# Altium PCB MB_SpectrumAnalyzer.PcbDoc (part 3 of 3)
Units mil, origin at the board's own origin, x right, y up, seen from the top; angles counter-clockwise.
Board outline 6149 x 3004 mil, 2 copper layers (Top Layer, Bottom Layer); 237 components, 180 nets, 644 pads, 101 vias.
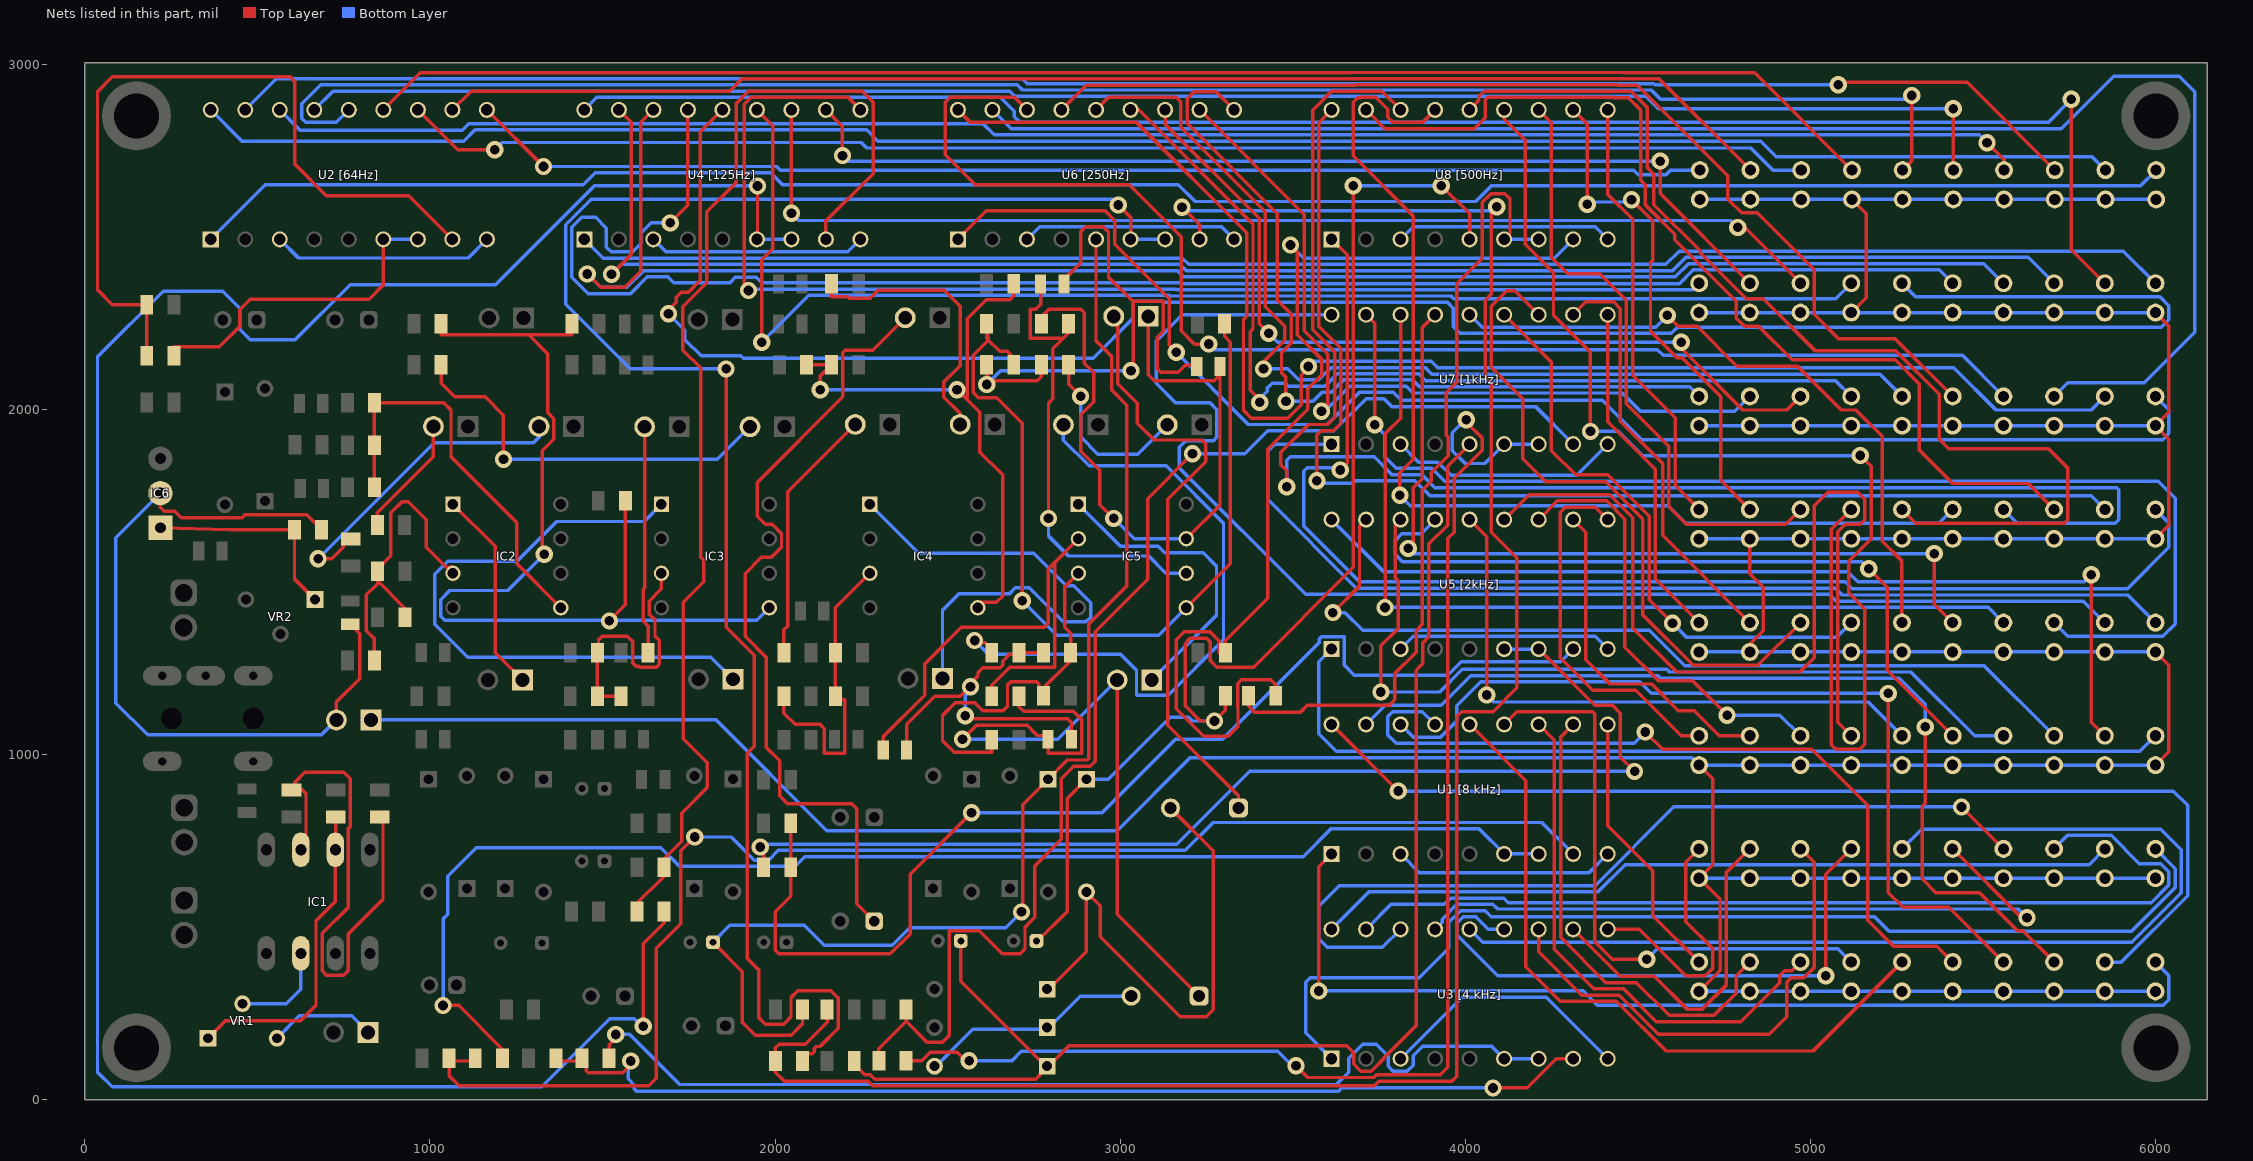
[diagram p2: the nets of this part, all layers, seen from the top]

## Via types
v1: diameter 50, hole 28, Top Layer to Bottom Layer, 101 vias

## Nets (pads, with @x,y where several pads share a name; then routed paths per layer and width w, separated by ;. In a path a pad name is that pad's centre, name@x,y a point inside that pad or via, vN(x,y) a via of type N, cw(c..) or ccw(c..) an arc to the next point about the centre after c; other vN are vias at no path point) (continued)
NetC24_2: C24.1 J15.02 | length 2339.1
  Top Layer w10: C24.1@2287.21,517 2236.1,568.12 2236.1,842.9 2222,857 2036,857 2013,880 2013,982 1975,1020 1975,1280 1913,1342 1913,1524 1960,1571 1989.54,1571 2018.54,1600 2018.54,1640 1991.54,1667 1971,1667 1948,1690 1948,1788 2196,2036 2196,2164 2203,2171 2282.8,2171 J15.02@2377.13,2265.33
NetC25_1: "U6 [250Hz].5" C25.1 D12.C R50.2 | length 3635.3
  Top Layer w10: C25.1@1820,456 1905,371 1905,224 1942,187 2046.37,187 2079.37,220 R50.2@2079.37,261 ; v1(2714,544) 2717.37,547.37 2717.37,854.6 D12.C@2791,928.23 2846.77,984 2903.77,984 2909,989.23 2909,1378 3019,1488 3019,2012 2975,2056 2975,2153 2929.67,2198.33 2929.67,2492.5
  Bottom Layer w10: C25.1@1820,456 1869,505 2084,505 2142,447 2339,447 2390,498 2668,498 v1(2714,544)
NetC26_1: C26.1 C27.1 R53.2 R54.2 | length 1031.5
  Top Layer w10: C27.1@2380.86,1013 2380.86,1087 2462.86,1169 2536.43,1169 2563.43,1196 v1(2566,1196) 2566,1206.82 2587.8,1228.62 2587.8,1236.8 2601.86,1250.86 2652.4,1250.86 2659.54,1257.99 2659.54,1270.54 2680,1291 2706.37,1291 R53.2@2706.37,1294.82 R54.2@2777.5,1294.82 ; v1(2551,1112) 2560,1103 2847.61,1103 2858.61,1092 C26.1@2858.61,1044
  Bottom Layer w10: v1(2551,1112) 2551,1170.18 2566,1185.18 v1(2566,1196)
NetC26_2: C26.2 C30.1 J18.02 R55.2 | length 2286.3
  Top Layer w10: v1(2543,1044) 2583.36,1084.36 2730.64,1084.36 2760,1055 2790.89,1055 C26.2@2790.89,1044 2790.89,1003 2889,1003 2889,1100 2864,1125 2720,1125 2706.37,1138.63 R55.2@2706.37,1168.82 ; J18.02@2991,1216 2991,537.43 C30.1@3228.43,300
  Bottom Layer w10: v1(2543,1044) 2819,1044 J18.02@2991,1216
NetC27_2: C27.2 IC5.2 R55.1 | length 1526.2
  Top Layer w10: C27.2@2313.14,1013 2313.14,1052.14 2433,1172 2433,1262.06 2539.78,1368.84 2780,1368.84 2791,1379.84 2791,1537.3 2810,1556.3 ; R55.1@2627.63,1168.82 2627.63,1200.63 2680,1253 2810,1253 2810,1556.3 ; IC5.2@2878.7,1625 2810,1556.3
NetC28_1: C28.1 IC5.7 J19.01 R60.1 | length 1989.7
  Top Layer w10: R60.1@2771.5,2248 2771.5,2268 2793.5,2290 2886,2290 2896,2280 2896,2134 2923,2107 2923,2022 2885,1984 2885,1879 2941,1823 2941,1724 v1(2981,1684) ; J19.01@3081.13,2269.33 3081.13,2100 3098.13,2083 3271.86,2083 C28.1@3288.86,2100 ; IC5.7@3191.3,1625 3288.86,1722.56 C28.1@3288.86,2100 ; C28.1@3288.86,2128 C28.1@3288.86,2100
  Bottom Layer w10: v1(2981,1684) 3040,1625 IC5.7@3191.3,1625
NetC28_2: C28.2 C29.2 R58.1 R59.2 | length 1953.9
  Top Layer w10: R59.2@2612.63,2129.18 2612.63,2098.37 v1@2628,2083 ; v1(2613,2072) 2624,2083 v1@2628,2083 ; R58.1@2771.5,2129.18 2771.5,2094.5 ; C29.2@2836.86,2362.82 2836.86,2376 2886,2425.14 2886,2515 2900,2529 2950,2529 2965.9,2513.1 2965.9,2383 3036.45,2312.45 3038,2312.45 ; v1(3031,2112) 3038,2119 3038,2312.45 ; C28.2@3221.14,2128 3188.55,2128 3167.55,2107 3117.25,2107 3107,2117.25 3107,2208.96 3124.25,2226.21 3124.25,2312.45 3038,2312.45 ; v1@2628,2083 2628.5,2082.5 2760,2082.5 2771.5,2094.01 2771.5,2094.5 ; v1@2628,2083 2760,2083 2771.5,2094.5
  Bottom Layer w10: v1(2613,2072) 2653,2112 v1(3031,2112)
NetC29_1: C29.1 IC5.6 R60.2 | length 1357.2
  Top Layer w10: C29.1@2769.14,2362.82 2769.14,2304 2755.14,2290 2739,2290 2739,2206 2834.24,2206 ; v1(2792,1684) 2792,2018 2804,2030 2804,2175.76 2834.24,2206 ; R60.2@2850.24,2248 2850.24,2222 2834.24,2206
  Bottom Layer w10: v1(2792,1684) 2792,1633 2850,1575 3082,1575 3132,1525 IC5.6@3191.3,1525
NetC30_2: C30.2 D13.A D14.C | length 655.4
  Bottom Layer w10: D13.A@2461.9,93 2572.9,204 2788.35,204 2884.35,300 C30.2@3031.57,300
NetC31_1: "U7 [1kHz].5" C31.1 D13.C R63.2 | length 4018.6
  Top Layer w10: R63.2@2229.37,112 2229.37,102.16 2259.48,72.04 2275.96,72.04 2288.37,59.63 2754.98,59.63 2768.86,73.5 2768.86,77.63 2784.23,93 D13.C@2788.35,93 ; C31.1@2538,456 2538,343.35 D13.C@2788.35,93 ; 4012,1899 3948.23,1835.23 3948.23,1664.23 3894,1610 3894,1341 3875.65,1322.65 3875.65,1263 3857,1244.35 3857,214.73 3762.64,120.37 3762.64,117.9 3734.73,90 3727.01,82.27 3696.99,82.27 3689.27,90 3675.77,103.49 3675.77,136.23 3656,156 2851.35,156 D13.C@2788.35,93
NetC32_1: C32.2 D15.C D16.A | length 1547.7
  Top Layer w10: D15.C@2788.36,315 2902,428.64 D16.A@2902,601.77 2942,561.77 2942,472 3174,240 3249,240 3269,260 3269,721.57 C32.2@3145.57,845
NetC32_2: C32.1 J19.02 | length 1745.1
  Top Layer w10: J19.02@2981.13,2269.33 2993,2257.46 2993,2074 3049,2018 3049,1960 3098,1911 3236,1911 3247,1900 3247,1848 3138,1739 3138,1084.43 3342.43,880 C32.1@3342.43,845
NetC33_1: "U8 [500Hz].5" C33.1 D16.C R66.2 | length 3582.4
  Top Layer w10: C33.1@2757,456 2847,546 2847,873.23 D16.C@2902,928.23 ; R66.2@3304.37,1170 3304.37,1128.37 v1(3273,1097) 3232,1097 3188,1141 3188,1321 3193.93,1326.93 3193.93,1328.75 3201.54,1336.36 3203.36,1336.36 3204,1337 3250,1337 3260,1327 3260,1273.27 3280,1253.27 3386.27,1253.27 3675,1542 v1(3675,2648) ; v1(3930,2648) 4012,2566 4012,2492.5
  Bottom Layer w10: D16.C@2902,928.23 2965.18,928.23 3144.95,1108 3198.06,1108 3209.06,1097 v1(3273,1097) ; v1(3675,2648) v1(3930,2648)
NetC34_2: C34.2 IC6.2 J21.02 R69.1 | length 2215.1
  Top Layer w10: IC6.2@219,1757 219,1716 230,1705 261,1705 280,1686 456,1686 464,1694 643.37,1694 R69.1@686.37,1651 ; J21.02@729,1100 729,1152 797,1220 797,1349.43 C34.2@769.29,1377.14
  Bottom Layer w10: IC6.2@219,1757 90,1628 90,1149 182,1057 686,1057 J21.02@729,1100
NetIC1_2: IC1.2 R3.2 VR1.1 | length 921
  Top Layer w10: VR1.1@357,178 407,228 624,228 670,274 670,518 726,574 IC1.2@726,724 726,770 727.06,771.06 R3.2@727.06,818.63
NetIC1_3: IC1.3 R1.2 R2.1 | length 1596.3
  Top Layer w10: R2.1@599.12,897.37 R2.1@609,897.37 ; IC1.3@626,724 626,740 641,740 641,886.37 630,897.37 R2.1@609,897.37 ; R1.2@855,818.63 864,818.63 864,581 764,481 764,375 750,361 700,361 688,373 688,481.9 764,557.9 764,786 768.6,790.6 768.6,930 750.6,948 637,948 609,920 R2.1@609,897.37
NetIC1_6: IC1.6 VR1.2 | length 290.4
  Bottom Layer w10: VR1.2@457,278 584,278 626,320 IC1.6@626,424
NetIC2_1: IC2.1 J10.01 | length 592.4
  Top Layer w10: IC2.1@1066.7,1725 1189,1602.7 1189,1295 J10.01@1268,1216
NetIC2_3: IC2.3 R4.1 R10.1 R11.2 | length 940.6
  Top Layer w10: R11.2@839.37,1272 839.37,1335 816,1358.37 816,1462.37 848.63,1495 R4.1@848.63,1502.74 ; R10.1@927.37,1397.5 927.37,1424 R4.1@848.63,1502.74 ; IC2.3@1066.7,1525 1066.7,1542.25 1046.75,1542.25 989,1600 989,1680 937,1732 919,1732 887,1700 887,1575.37 848.63,1537 R4.1@848.63,1531.09 R4.1@848.63,1502.74
NetIC2_5: IC2.5 R13.1 R14.1 R15.1 | length 1179.8
  Top Layer w10: R13.1@839.37,1774.33 R14.1@839.37,1896 R15.1@839.37,2019 1040,2019 1061,1998 1061,1862 1251,1672 1251,1553.3 IC2.5@1379.3,1425
NetIC3_1: IC3.1 J12.01 | length 1816.6
  Bottom Layer w10: IC3.1@1670.7,1725 1620.7,1675 1367,1675 1252.25,1560.25 1051.25,1560.25 1013.45,1522.45 1013.45,1377.77 1109.22,1282 1814,1282 J12.01@1878,1218
NetIC3_3: IC3.3 R20.1 R22.1 R23.2 | length 780.1
  Top Layer w10: R23.2@1553.5,1169 R20.1@1485.37,1169 R22.1@1485.37,1294.82 1488.36,1297.81 1488.36,1332.5 1498.86,1343 1572,1343 1587,1328 1587,1266 1598,1255 1606.43,1255 1608.16,1253.27 1656.42,1253.27 1664,1260.86 1664,1331 1652,1343 1652,1390 1635.45,1406.55 1635.45,1444.45 1670.7,1479.7 IC3.3@1670.7,1525
NetIC3_5: IC3.5 R25.1 R26.1 R27.1 | length 2864
  Top Layer w10: R27.1@1032.37,2248 1032.37,2216 1286,2216 ; v1(1331,1580) 1326,1585 1326,1880 1359.25,1913.25 1359.25,1972.75 1342,1990 1342,2160 1286,2216 ; R25.1@1411.63,2248 1411.63,2216 1286,2216 ; v1@1521,1389 1566.37,1434.37 R26.1@1566.37,1735
  Bottom Layer w10: v1(1331,1580) 1226,1475 1058,1475 1031.45,1448.45 1031.45,1400 1042.45,1389 1947.3,1389 IC3.5@1983.3,1425
  other v1: 1520,1387
NetIC4_1: IC4.1 J14.01 | length 1500.1
  Bottom Layer w10: IC4.1@2274.7,1725 2416.7,1583 2749,1583 2843,1489 2865,1489 2914,1440 2914,1398 2900,1384 2835,1384 2736,1483 2696,1483 2678,1465 2532,1465 2485,1418 J14.01@2485,1220
NetIC4_3: IC4.3 R37.1 R39.1 R40.2 | length 905
  Top Layer w10: R37.1@2025.63,1169 2025.63,1120 2058.63,1087 2130,1087 2142.93,1074.07 2142.93,1003.64 2202,1003.64 2202,1159 2174.63,1159 R40.2@2174.63,1169 R39.1@2174.63,1294.82 2174.63,1424.93 IC4.3@2274.7,1525
NetIC4_5: IC4.5 R42.1 R44.1 R45.1 | length 1734.3
  Top Layer w10: R45.1@2091.24,2129.18 R44.1@2163.63,2129.18 2131,2096.55 v1(2131,2057) ; v1(2527,2057) 2556.21,2027.79 ; IC4.5@2587.3,1425 2587.3,1441 2641,1441 2659,1459 2659,1810 2593,1876 2593,1991 2556.21,2027.79 ; R42.1@2691.37,2364 2691.37,2328.74 2680,2317.37 2611.37,2317.37 2556.21,2262.21 2556.21,2027.79
  Bottom Layer w10: v1(2131,2057) v1(2527,2057)
NetIC5_1: IC5.1 J18.01 | length 881.5
  Bottom Layer w10: IC5.1@2878.7,1725 3000.7,1603 3110,1603 3129,1584 3240,1584 3278.68,1545.32 3278.68,1403.68 J18.01@3091,1216
NetIC5_3: IC5.3 R54.1 R56.1 R57.2 | length 1080.1
  Top Layer w10: R57.2@2627.63,1042.82 2627.63,1006 2519,1006 2485,1040 2485,1112.95 2522.06,1150.01 2578.04,1150.01 2601.05,1127 2660.32,1127 2673.32,1140 2673.32,1201.39 2682.92,1211 2758.33,1211 2764.19,1205.14 2764.19,1193.54 2764.73,1193 R56.1@2777.5,1193 ; R56.1@2777.5,1170 R56.1@2777.5,1193 ; IC5.3@2878.7,1525 2839,1485.3 2839,1368.24 2856.24,1351 R54.1@2856.24,1294.82 2856.24,1271.74 R56.1@2777.5,1193
NetIC5_5: IC5.5 R59.1 R61.1 R62.1 | length 2508.4
  Top Layer w10: R59.1@2691.37,2129.18 2691.37,2149 2672.75,2167.62 2650.3,2167.62 2617.78,2200.14 ; v1(2716,1445) 2716,1960 2642,2034 2589.02,2034 2574.21,2048.8 2574.21,2156.58 2617.78,2200.14 ; IC5.5@3191.3,1425 3319,1552.7 3319,2194.6 3302.24,2211.36 R61.1@3302.24,2248 ; 2617.78,2200.14 2612.63,2205.29 R62.1@2612.63,2248 2617.78,2200.14
  Bottom Layer w10: v1(2716,1445) 2816,1345 3111.3,1345 IC5.5@3191.3,1425
NetIC6_1: IC6.1 R69.2 VR2.1 | length 615.3
  Top Layer w10: IC6.1@219,1657 419,1651 R69.2@607.63,1651 607.63,1508.37 VR2.1@667,1449
NetJ4_01: J4.01 VR1.3 | length 310.8
  Bottom Layer w10: VR1.3@557,178 622,243 773,243 J4.01@821,195
NetJ5_02: J5.02 R9.1 | length 353
  Top Layer w10: R9.1@847.63,1664.67 847.63,1700 1010.13,1862.5 J5.02@1010.13,1950.33
NetJ6_02: J6.02 R12.2 | length 949.7
  Top Layer w10: v1(676,1567) 716,1567 749,1600 749,1624.37 R12.2@770.47,1624.37
  Bottom Layer w10: v1(676,1567) 1012,1903 1300,1903 1316.13,1919.13 J6.02@1316.13,1950.33
NetJ7_02: J7.02 R29.1 | length 662.6
  Top Layer w10: J7.02@1622.13,1949.33 1622.13,1482.92 1617.45,1478.25 1617.45,1386.54 1632.24,1371.75 R29.1@1632.24,1294.82
NetJ8_02: J8.02 R24.2 | length 1153.5
  Top Layer w10: R24.2@1032.37,2129.18 1032.37,2076 1072.37,2036 1160,2036 1213,1983 v1(1213,1855)
  Bottom Layer w10: v1(1213,1855) 1832.79,1855 J8.02@1927.12,1949.33
NetJ9_02: J9.02 R41.2 | length 821.9
  Top Layer w10: R41.2@2163.63,2364 2163.63,2326 2211,2326 2215,2322 2275.55,2322 2298,2344.45 2490.55,2344.45 2536.13,2298.87 2536.13,2126.27 2489,2079.14 2489,2034.93 2536.13,1987.8 J9.02@2536.13,1956.33
NetJ16_02: J16.02 R53.1 | length 1910.7
  Top Layer w10: v1(2578,1330) 2584.5,1323.5 2608.79,1323.5 2627.63,1304.66 R53.1@2627.63,1294.82
  Bottom Layer w10: v1(2578,1330) 2617,1291 3000,1291 3047,1244 3047,1172 3138.57,1172 3299,1332.43 3299,1670 3133,1836 2910,1836 2835.13,1910.87 J16.02@2835.13,1955.33
NetJ17_02: J17.02 R58.2 | length 530.8
  Top Layer w10: R58.2@2850.24,2129.18 2850.24,2072.76 v1(2885,2038)
  Bottom Layer w10: v1(2885,2038) 2885,1920 2935,1870 3050.79,1870 J17.02@3136.12,1955.33
NetJ20_02: J20.02 R36.1 | length 747
  Top Layer w10: R36.1@2025.63,1294.82 2025.63,1360.84 2036.54,1371.75 2036.54,1760.75 J20.02@2232.13,1956.33
NetLED00_K: "U1 [8 kHz].1" LD00.K | length 3023.8
  Top Layer w10: v1(3575,315) 3575,675 3612,712
  Bottom Layer w10: v1(3575,315) 4341,315 4382,274 6022,274 6038,290 6038,359.71 LD00.K@5999,398.71
NetLED01_K: "U1 [8 kHz].18" LD01.K | length 3158.5
  Top Layer w10: 3612,1087 v1(3805,894)
  Bottom Layer w10: v1(3805,894) 6051,894 6092,853 6092,591 5899.71,398.71 LD01.K@5852.11,398.71
NetLED02_K: "U1 [8 kHz].17" LD02.K | length 2704.4
  Top Layer w10: v1(5331.96,1079.96) 5331.96,859.05 5323,850.09 5323,640 5363,600 5489.24,600 5599.32,489.92 5614.01,489.92 LD02.K@5705.22,398.71
  Bottom Layer w10: 3712,1087 3768,1143 3930,1143 4015.23,1228.23 4558.24,1228.23 4565.47,1221 5257,1221 5331.96,1146.04 v1(5331.96,1079.96)
NetLED03_K: "U1 [8 kHz].16" LD03.K | length 2527.8
  Top Layer w10: v1(5225,1177) 5225,600 5268,557 5400.04,557 LD03.K@5558.33,398.71
  Bottom Layer w10: 3812,1087 3848.45,1050.55 3928.55,1050.55 3975,1097 3975,1141.5 4043.73,1210.23 4505.23,1210.23 4538.46,1177 v1(5225,1177)
NetLED04_K: "U1 [8 kHz].15" LD04.K | length 2342.5
  Top Layer w10: v1(4521,1065) 4571,1015 5003,1015 5165,853 5165,520 5240,445 5365.16,445 LD04.K@5411.44,398.71
  Bottom Layer w10: 3912,1087 3875,1124 3789,1124 3775,1110 3775,1056.55 3799,1032.55 4488.55,1032.55 v1(4521,1065)
NetLED05_K: "U1 [8 kHz].14" LD05.K | length 2066.9
  Top Layer w10: 4012,1087 4175,924 4175,385 4275,285 4437.23,285 4581.23,141 5006.84,141 LD05.K@5264.56,398.71
NetLED06_K: "U1 [8 kHz].13" LD06.K | length 1734.1
  Top Layer w10: 4112,1087 4149,1124 4369,1124 4375,1118 4375,457 4425,407 v1(4525,407)
  Bottom Layer w10: v1(4525,407) 4555.71,437.71 5078.67,437.71 LD06.K@5117.67,398.71
NetLED07_K: "U1 [8 kHz].12" LD07.K | length 1554.3
  Top Layer w10: 4212,1087 4257.77,1041.23 4257.77,435.25 4372.02,321 4457.75,321 4552.75,226 4798.07,226 4910.97,338.91 4910.97,360 4924.49,373.52 4945.58,373.52 LD07.K@4970.78,398.71
NetLED08_K: "U1 [8 kHz].11" LD08.K | length 1367.6
  Top Layer w10: 4312,1087 4275.77,1050.77 4275.77,470 4406.77,339 4494.82,339 4589.82,244 4720,244 4784,308 4784,358.82 LD08.K@4823.89,398.71
NetLED09_K: "U1 [8 kHz].10" LD09.K | length 798.1
  Top Layer w10: 4412,1087 4412,794 4543,663 4543,532.71 LD09.K@4677,398.71
NetLED10_K: "U2 [64Hz].1" LD10.K | length 5788.1
  Bottom Layer w10: 365,2492.5 523.5,2651 1444.58,2651 1478.98,2685.39 1987,2685.39 2021.39,2651 3167.91,2651 3216.91,2602 4029.4,2602 4074.4,2647 5955,2647 LD10.K@6001,2693
NetLED11_K: "U2 [64Hz].18" LD11.K | length 5588.6
  Bottom Layer w10: 365,2867.5 455.5,2777 1097.79,2777 1130.6,2809.81 2265.13,2809.81 2297.94,2777 4855.89,2777 4900.89,2732 5815.11,2732 LD11.K@5854.11,2693
NetLED12_K: "U2 [64Hz].17" LD12.K | length 5395.1
  Top Layer w10: v1(5080,2940) 5087,2947 5453.22,2947 LD12.K@5707.22,2693
  Bottom Layer w10: 465,2867.5 555.23,2957.73 2715.94,2957.73 2730.67,2943 4545.46,2943 4548.46,2940 v1(5080,2940)
NetLED13_K: "U2 [64Hz].16" LD13.K | length 5100.6
  Top Layer w10: v1(5511,2772) 5560.33,2722.67 LD13.K@5560.33,2693
  Bottom Layer w10: 565,2867.5 623.5,2809 1093.79,2809 1112.6,2827.81 2602.19,2827.81 2635,2795 5488,2795 v1(5511,2772)
NetLED14_K: "U2 [64Hz].15" LD14.K | length 4969.7
  Top Layer w10: LD14.K@5413.44,2693 v1(5413.44,2870.6)
  Bottom Layer w10: 665,2867.5 719.23,2921.73 2679.94,2921.73 2694.67,2907 4522,2907 4558.4,2870.6 v1(5413.44,2870.6)
NetLED15_K: "U2 [64Hz].14" LD15.K | length 5133.9
  Top Layer w10: LD15.K@5266.56,2693 5293,2719.44 v1(5293,2909)
  Bottom Layer w10: 765,2867.5 728.77,2831.27 640,2831.27 628.77,2842.5 628.77,2884.77 683.73,2939.73 2701.9,2939.73 2716.63,2925 4538,2925 4565,2898 5282,2898 v1(5293,2909)
NetLED16_K: "U2 [64Hz].13" LD16.K | length 4416.6
  Top Layer w10: 865,2867.5 972.5,2975 3666.44,2975 3667.17,2975.73 4456.83,2975.73 4457.56,2975 4837.67,2975 LD16.K@5119.67,2693
NetLED17_K: "U2 [64Hz].12" LD17.K | length 4097.5
  Top Layer w10: 965,2867.5 1080.5,2752 v1(1188,2752)
  Bottom Layer w10: v1(1188,2752) 1209,2773 2250,2773 2266,2757 4827,2757 4891,2693 LD17.K@4972.78,2693
NetLED18_K: "U2 [64Hz].11" LD18.K | length 3907.9
  Top Layer w10: 1065,2867.5 1119.23,2921.73 1868.43,2921.73 1903.7,2957 3673.9,2957 3674.63,2957.73 4449.37,2957.73 4450.1,2957 4561.89,2957 LD18.K@4825.89,2693
NetLED19_K: "U2 [64Hz].10" LD19.K | length 3597
  Top Layer w10: 1165,2867.5 v1(1329.11,2703.39)
  Bottom Layer w10: v1(1329.11,2703.39) 2005,2703.39 2015.39,2693 4488,2693 4501,2680 4581,2680 4594,2693 LD19.K@4679,2693
NetLED20_K: "U3 [4 kHz].1" LD20.K | length 3113.9
  Bottom Layer w10: 3612,118.5 3537,193.5 3537,340 3550,353 3866,353 3952,439 3952,513.46 3986.27,547.73 4057.27,547.73 4075,530 5185,530 5227,488 5929.46,488 6056,614.54 6056,669.47 LD20.K@5999,726.47
NetLED21_K: "U3 [4 kHz].18" LD21.K | length 2336.6
  Bottom Layer w10: 3612,493.5 3720.23,601.73 4383.73,601.73 4463,681 5806.64,681 LD21.K@5852.11,726.47
NetLED22_K: "U3 [4 kHz].17" LD22.K | length 2820.9
  Bottom Layer w10: 3712,493.5 3784.23,565.73 3939.07,565.73 3957.07,583.73 4110.96,583.73 4124.31,570.38 5986.38,570.38 6038,622 6038,660 6014,684 5952,684 5870.53,765.47 5744.22,765.47 LD22.K@5705.22,726.47
NetLED23_K: "U3 [4 kHz].16" LD23.K | length 2516.1
  Top Layer w10: v1(5436.8,848) LD23.K@5558.33,726.47
  Bottom Layer w10: 3812,493.5 3759.5,441 3600,441 3575,466 3575,560 3634.73,619.73 4375.73,619.73 4604,848 v1(5436.8,848)
NetLED24_K: "U3 [4 kHz].15" LD24.K | length 2064.5
  Top Layer w10: LD24.K@5411.44,726.47 5610.91,527 v1(5627,527)
  Bottom Layer w10: 3912,493.5 3932.23,513.73 3932.23,522.89 3975.07,565.73 4079.61,565.73 4092.96,552.38 5601.62,552.38 v1(5627,527)
NetLED25_K: "U3 [4 kHz].14" LD25.K | length 3119.7
  Bottom Layer w10: 4012,493.5 4049.79,455.71 5930.71,455.71 6074,599 6074,724 6014.53,783.47 5321.56,783.47 LD25.K@5264.56,726.47
NetLED26_K: "U3 [4 kHz].13" LD26.K | length 1709
  Top Layer w10: v1(5044,359) 5044,652.8 LD26.K@5117.67,726.47
  Bottom Layer w10: 4112,493.5 4065.5,493.5 4029.27,529.73 3993.73,529.73 3975,511 3975,478 4094,359 v1(5044,359)
NetLED27_K: "U3 [4 kHz].12" LD27.K | length 1461.3
  Top Layer w10: 4212,493.5 4212,428 4337,303 4445,303 4559,189 4880,189 4931,240 4931,340 4944,353 4980.22,353 5010,382.78 5010,687.24 LD27.K@4970.78,726.47
NetLED28_K: "U3 [4 kHz].11" LD28.K | length 991
  Top Layer w10: 4312,493.5 4448.5,357 4547.34,357 4641.77,262.57 4686.57,262.57 4756.16,332.16 4756.16,658.73 LD28.K@4823.89,726.47
NetLED29_K: "U3 [4 kHz].10" LD29.K | length 763.3
  Top Layer w10: 4412,493.5 4503.5,493.5 4638,359 4695,359 4716,380 4716,438 4638,516 4638,687.47 LD29.K@4677,726.47
NetLED30_K: "U4 [125Hz].1" LD30.K | length 4636.1
  Bottom Layer w10: 1447.33,2492.5 1501.83,2438 3180.01,2438 3198.01,2420 4580.67,2420 4618.91,2458.24 5906,2458.24 LD30.K@5999,2365.24
NetLED31_K: "U4 [125Hz].18" LD31.K | length 4962.3
  Top Layer w10: v1(5755,2898) 5755,2462.35 LD31.K@5852.11,2365.24
  Bottom Layer w10: 1447.33,2867.5 1483.56,2903.73 2652.27,2903.73 2693,2863 2693,2848 2710,2831 5688,2831 v1(5755,2898)
NetLED32_K: "U4 [125Hz].17" LD32.K | length 4760.9
  Top Layer w10: v1(1526,2391) 1583.56,2448.56 1583.56,2831.27 1547.33,2867.5
  Bottom Layer w10: v1(1526,2391) 1555,2420 3172.55,2420 3190.55,2402 4600.54,2402 4638.79,2440.24 5630.22,2440.24 LD32.K@5705.22,2365.24
NetLED33_K: "U4 [125Hz].16" LD33.K | length 4858.9
  Top Layer w10: v1(1456,2392) 1495,2353 1564,2353 1611,2400 1611,2831.17 1647.33,2867.5
  Bottom Layer w10: v1(1456,2392) 1495,2353 1570.2,2353 1619.2,2402 3165.1,2402 3183.1,2384 4608,2384 4646.24,2422.24 5501.33,2422.24 LD33.K@5558.33,2365.24
NetLED34_K: "U4 [125Hz].15" LD34.K | length 5010.2
  Top Layer w10: v1(1696,2540) 1747.33,2591.33 1747.33,2867.5
  Bottom Layer w10: v1(1696,2540) 1641.1,2540 1611.1,2510 1611.1,2480 1587.1,2456 1525,2456 1511,2470 1511,2525 1480,2556 1440,2556 1411,2527 1411,2383 1459,2335 1581,2335 1630,2384 1689.14,2384 1706.69,2366.45 1869.45,2366.45 1885,2382 1945.45,2382 1961,2366.45 3175.19,2366.45 3177.41,2364.23 4619.98,2364.23 4660,2404.24 5372.44,2404.24 LD34.K@5411.44,2365.24
NetLED35_K: "U4 [125Hz].14" LD35.K | length 6106.8
  Top Layer w10: v1(1691,2277) 1691,2287.82 1713.38,2310.21 1713.38,2324.38 1728.11,2339.11 1749.11,2339.11 1783.56,2373.56 1783.56,2803.73 1847.33,2867.5
  Bottom Layer w10: v1(1691,2277) 1738.7,2229.3 1738.7,2202.04 1741.63,2199.11 1785.74,2155 1901,2155 1908,2148 2921.44,2148 3038,2264.56 3038,2312.45 3125,2312.45 3127.22,2310.23 3948,2310.23 3965,2293.23 3965,2240 3985.23,2219.77 4596,2219.77 4614.23,2238 6016,2238 6038,2260 6038,2300 6012,2326 5303.8,2326 LD35.K@5264.56,2365.24
NetLED36_K: "U4 [125Hz].13" LD36.K | length 3942.1
  Top Layer w10: 1947.33,2867.5 1993.24,2821.59 1993.24,2465.24 1961,2433 v1(1961,2194)
  Bottom Layer w10: v1(1961,2194) 2097.45,2330.45 3142.25,2330.45 3144.47,2328.23 3958,2328.23 3966.23,2320 5072.42,2320 LD36.K@5117.67,2365.24
NetLED37_K: "U4 [125Hz].12" LD37.K | length 3307.1
  Top Layer w10: v1(2047.33,2567.67) 2047.33,2867.5 ; v1(4789.02,2527) 4809.02,2527 LD37.K@4970.78,2365.24
  Bottom Layer w10: v1(2047.33,2567.67) 2068,2547 4769.02,2547 v1(4789.02,2527)
NetLED38_K: "U4 [125Hz].11" LD38.K | length 2989.2
  Top Layer w10: 2147.33,2867.5 2195.12,2819.71 v1(2195.12,2735) ; v1(4564,2719) 4564,2625.13 LD38.K@4823.89,2365.24
  Bottom Layer w10: v1(2195.12,2735) 2211.12,2719 v1(4564,2719)
NetLED39_K: "U4 [125Hz].10" LD39.K | length 3669.1
  Top Layer w10: v1(1923,2344) 1911,2356 1911,2884 1930.73,2903.73 2211.1,2903.73 2247.33,2867.5
  Bottom Layer w10: v1(1923,2344) 1927.45,2348.45 3160.25,2348.45 3162.47,2346.23 4657.98,2346.23 LD39.K@4677,2365.24
NetLED40_K: "U5 [2kHz].1" LD40.K | length 2724.7
  Bottom Layer w10: 3612,1305.5 3575,1268.5 3575,1060 3626,1009 5953.78,1009 LD40.K@5999,1054.22
NetLED41_K: "U5 [2kHz].18" LD41.K | length 2767.4
  Top Layer w10: v1(5813,1521) 5813,1093.33 LD41.K@5852.11,1054.22
  Bottom Layer w10: 3612,1680.5 3762.5,1530 5106,1530 5136,1500 5792,1500 v1(5813,1521)
NetLED42_K: "U5 [2kHz].17" LD42.K | length 2546.3
  Top Layer w10: v1(3616,1411) 3693,1488 3693,1661.5 3712,1680.5
  Bottom Layer w10: v1(3616,1411) 3650.96,1411 3701.96,1360 4532,1360 4634.87,1257.13 5502.31,1257.13 LD42.K@5705.22,1054.22
NetLED43_K: "U5 [2kHz].16" LD43.K | length 2441.1
  Top Layer w10: v1(3755,1181) 3755,1315 3805,1365 3805,1503 3796,1512 3796,1664.5 3812,1680.5
  Bottom Layer w10: v1(3755,1181) 3925,1181 3991,1247 4583,1247 4591,1239 5290.13,1239 5474.91,1054.22 LD43.K@5558.33,1054.22
NetLED44_K: "U5 [2kHz].15" LD44.K | length 2155.1
  Top Layer w10: v1(5168,1538) 5222,1484 5222,1243.67 LD44.K@5411.44,1054.22
  Bottom Layer w10: 3912,1680.5 3871.5,1640 3816,1640 3796,1620 3796,1580 3817,1559 5147,1559 v1(5168,1538)
NetLED45_K: "U5 [2kHz].14" LD45.K | length 1780.4
  Top Layer w10: 4012,1680.5 4062,1630.5 v1(4062,1172.23)
  Bottom Layer w10: v1(4062,1172.23) 4082.23,1152 5166.78,1152 LD45.K@5264.56,1054.22
NetLED46_K: "U5 [2kHz].13" LD46.K | length 2717.6
  Top Layer w10: 4112,1680.5 4184.23,1752.73 4418.06,1752.73 4485,1685.79 4485,1366 4612,1239 4969,1239 5010,1280 5010,1720 5050,1760 5137,1760 5157,1740 5157,1680 5144,1667 5100,1667 5078,1645 5078,1093.89 LD46.K@5117.67,1054.22
NetLED47_K: "U5 [2kHz].12" LD47.K | length 1280.5
  Top Layer w10: 4212,1680.5 4266.23,1734.73 4409.01,1734.73 4462,1681.74 4462,1310.72 4559.72,1213 4659,1213 v1(4758,1114)
  Bottom Layer w10: v1(4758,1114) 4911,1114 LD47.K@4970.78,1054.22
NetLED48_K: "U5 [2kHz].11" LD48.K | length 987.7
  Top Layer w10: 4312,1680.5 4349,1643.5 4349,1274 4418.74,1204.26 4539.22,1204.26 4616.48,1127 4663,1127 4735.78,1054.22 LD48.K@4823.89,1054.22
NetLED49_K: "U5 [2kHz].10" LD49.K | length 1075.6
  Top Layer w10: 4412,1680.5 4375.77,1716.73 4289.73,1716.73 4275,1702 4275,1280 4368.74,1186.26 4493.2,1186.26 4625.24,1054.22 LD49.K@4677,1054.22
NetLED50_K: "U6 [250Hz].1" LD50.K | length 4144.4
  Top Layer w10: 2529.67,2492.5 2612.17,2575 2955.63,2575 2983.9,2546.73 2983.9,2478.35 3142.25,2320 3142.25,2185 v1(3162.25,2165)
  Bottom Layer w10: v1(3162.25,2165) 3371.25,1956 3600,1956 3693,2049 3791.23,2049 3814.23,2026 4396,2026 4510,1912 6020,1912 6038,1930 6038,1998.49 LD50.K@5999,2037.49
NetLED51_K: "U6 [250Hz].18" LD51.K | length 4203
  Top Layer w10: 2529.67,2867.5 2566.17,2831 3047,2831 3366.5,2511.5 3366.5,2269.21 3357,2259.71 3357,1997.14 3380,1974.14 3485.14,1974.14 3524,2013 3524,2098.14 3545,2119.14 v1(3545,2124)
  Bottom Layer w10: v1(3545,2124) 3560,2139 3901,2139 3920,2120 5415,2120 5537,1998 5812.62,1998 LD51.K@5852.11,2037.49
NetLED52_K: "U6 [250Hz].17" LD52.K | length 4769.1
  Bottom Layer w10: 2629.67,2867.5 2684.17,2813 5726,2813 5878,2965 6068,2965 6113,2920 6113,2223 5967,2077 5744.73,2077 LD52.K@5705.22,2037.49
NetLED53_K: "U6 [250Hz].16" LD53.K | length 3924.2
  Top Layer w10: 2729.67,2867.5 2693.44,2903.73 2507.73,2903.73 2493,2889 2493,2738 2580,2651 3026,2651 3177,2500 3177,2227 3215,2189 v1(3256,2189)
  Bottom Layer w10: v1(3256,2189) 3272,2173 4556.12,2173 4573.12,2156 5439.82,2156 LD53.K@5558.33,2037.49
NetLED54_K: "U6 [250Hz].15" LD54.K | length 3100.4
  Top Layer w10: 2829.67,2867.5 2901.17,2939 3681.35,2939 3682.08,2939.73 4441.92,2939.73 4442.65,2939 4497.3,2939 4760,2676.3 4760,2609 4800,2569 4845,2569 5010,2404 5010,2275 5080,2205 5243.93,2205 LD54.K@5411.44,2037.49
NetLED55_K: "U6 [250Hz].14" LD55.K | length 3102.5
  Top Layer w10: 2929.67,2867.5 2965.9,2903.73 3162.27,2903.73 3175.44,2890.56 3175.44,2817.35 3420.5,2572.28 3420.5,2297.5 3477,2241 3477,2199.84 3415,2137.84 v1(3415,2117)
  Bottom Layer w10: v1(3415,2117) 3485,2117 3516.76,2085.24 3575.01,2085.24 3610.77,2121 3883,2121 3902.77,2101.23 5200.82,2101.23 LD55.K@5264.56,2037.49
NetLED56_K: "U6 [250Hz].13" LD56.K | length 2817.4
  Top Layer w10: 3029.67,2867.5 3053,2867.5 3384.5,2536 3384.5,2233.25 3376,2224.75 3376,2055.64 3404,2027.64 v1(3404,2020)
  Bottom Layer w10: v1(3404,2020) 3404,2030.82 3425.83,2052.65 3425.83,2061.83 3440,2076 3478.24,2076 3487,2067.24 3593.01,2067.24 3628.77,2103 3865,2103 3884.77,2083.23 5071.93,2083.23 LD56.K@5117.67,2037.49
NetLED57_K: "U6 [250Hz].12" LD57.K | length 2431.3
  Top Layer w10: 3129.67,2867.5 3129.67,2826.37 3402.5,2553.54 3402.5,2247.5 v1(3430,2220) ; v1(4625,2194) 4625,2176.46 4803.46,1998 4931.29,1998 LD57.K@4970.78,2037.49
  Bottom Layer w10: v1(3430,2220) 3456,2194 v1(4625,2194)
NetLED58_K: "U6 [250Hz].11" LD58.K | length 2354.1
  Top Layer w10: 3229.67,2867.5 3533.1,2564.06 3533.1,2227.9 3601,2160 3601,2014 3583,1996 v1(3583,1994)
  Bottom Layer w10: v1(3583,1994) 3591.77,1994 3664.77,2067 3829,2067 3848.77,2047.23 4453.77,2047.23 4507,1994 4780.4,1994 LD58.K@4823.89,2037.49
NetLED59_K: "U6 [250Hz].10" LD59.K | length 2427.5
  Top Layer w10: 3329.67,2867.5 3277.17,2920 3213.44,2920 3193.44,2900 3193.44,2828.56 3455,2567 3455,2316 3495,2276 3495,2192 3467,2164 3467,2105.41 3480,2092.41 v1(3480,2023)
  Bottom Layer w10: v1(3480,2023) 3558.26,2023 3584.5,2049.24 3611.01,2049.24 3646.77,2085 3847,2085 3866.77,2065.23 4649.26,2065.23 LD59.K@4677,2037.49
NetLED60_K: "U7 [1kHz].1" LD60.K | length 3053.2
  Bottom Layer w10: 3612,1899 3447,1899 3427,1879 3427,1739 3684,1482 5072,1482 5092,1462 5918.98,1462 LD60.K@5999,1381.98
NetLED61_K: "U7 [1kHz].18" LD61.K | length 3997.7
  Bottom Layer w10: 3612,2274 3180,2274 3104,2198 3104,2075 3160,2019 3260,2019 3280,1999 3280,1919 3270,1909 3190,1909 3171,1890 3171,1830 3537,1464 5054,1464 5074,1444 5790.09,1444 LD61.K@5852.11,1381.98
NetLED62_K: "U7 [1kHz].17" LD62.K | length 3519.7
  Top Layer w10: 3712,2274 3737,2249 v1(3737,1955)
  Bottom Layer w10: v1(3737,1955) 3766,1926 3766,1863 3800,1829 3902.23,1829 3940.23,1791 6007,1791 6056,1742 6056,1378 6020,1342 5745.2,1342 LD62.K@5705.22,1381.98
NetLED63_K: "U7 [1kHz].16" LD63.K | length 2676.2
  Top Layer w10: v1(3767,1426) 3767,1929 3812,1974 3812,2274
  Bottom Layer w10: v1(3767,1426) 5514.31,1426 LD63.K@5558.33,1381.98
NetLED64_K: "U7 [1kHz].15" LD64.K | length 2461.7
  Top Layer w10: v1(3834,1597) 3849,1612 3849,1772.77 3875,1798.77 3875,2237 3912,2274 ; v1(5358,1582) 5358,1435.42 LD64.K@5411.44,1381.98
  Bottom Layer w10: v1(3834,1597) 3849,1582 v1(5358,1582)
NetLED65_K: "U7 [1kHz].14" LD65.K | length 1933
  Top Layer w10: v1(4585,2272) 4616.98,2240.02 4671.27,2240.02 4786.29,2125 4962,2125 5089,1998 5131,1998 5207.56,1921.44 5207.56,1617.44 5264.56,1560.44 LD65.K@5264.56,1381.98
  Bottom Layer w10: 4012,2274 4048.23,2237.77 4550.77,2237.77 v1(4585,2272)
NetLED66_K: "U7 [1kHz].13" LD66.K | length 1702.9
  Top Layer w10: 4112,2274 4249,2137 4249,1880 4319,1810 4411.71,1810 4532,1689.71 4532,1448 v1(4600,1380)
  Bottom Layer w10: v1(4600,1380) 4641,1339 5074.69,1339 LD66.K@5117.67,1381.98
NetLED67_K: "U7 [1kHz].12" LD67.K | length 1930.2
  Top Layer w10: 4212,2274 4143,2343 4120,2343 4075,2298 4075,2122 4166.23,2030.77 4166.23,1856.77 4233,1790 4406.25,1790 4514,1682.25 4514,1403.98 4660,1257.98 4846.78,1257.98 LD67.K@4970.78,1381.98
NetLED68_K: "U7 [1kHz].11" LD68.K | length 1224.9
  Top Layer w10: 4312,2274 4349,2311 4429,2311 4448.23,2291.77 4448.23,1965.77 4571,1843 4571,1634.86 LD68.K@4823.89,1381.98
NetLED69_K: "U7 [1kHz].10" LD69.K | length 1001.8
  Top Layer w10: 4412,2274 4412,1964.17 4550,1826.17 4550,1508.98 LD69.K@4677,1381.98
NetLED70_K: "U8 [500Hz].1" LD70.K | length 3724.9
  Top Layer w10: 3612,2492.5 3657,2447.5 3657,1844 v1(3637,1824)
  Bottom Layer w10: v1(3637,1824) 3630,1831 3542,1831 3531,1820 3531,1662 3693,1500 5100.3,1500 5120.3,1480 5918,1480 6038,1600 6038,1670.73 LD70.K@5999,1709.73
NetLED71_K: "U8 [500Hz].18" LD71.K | length 3488.4
  Top Layer w10: v1(3569.58,1793) 3569.58,1925.58 3582,1938 3617,1938 3639,1960 3639,2176.88 3575,2240.88 3575,2830.5 3612,2867.5
  Bottom Layer w10: v1(3569.58,1793) 3576.58,1786 3675,1786 3682,1793 3853.23,1793 3897.23,1749 5812.84,1749 LD71.K@5852.11,1709.73
NetLED72_K: "U8 [500Hz].17" LD72.K | length 2881.3
  Top Layer w10: 3712,2867.5 3766.5,2813 4025.75,2813 4057.77,2845.02 4057.77,2897.14 4064.36,2903.73 4427.01,2903.73 4427.73,2903 4472.03,2903 4508,2867.03 4508,2663.18 4520.23,2650.95 4520.23,2593.23 4606.69,2506.76 4606.69,2490.71 4784.89,2312.51 4784.89,2264.09 4807.73,2241.24 4848.76,2241.24 4947,2143 5244.81,2143 5314,2073.81 5314,1883 5412,1785 5629.95,1785 LD72.K@5705.22,1709.73
NetLED73_K: "U8 [500Hz].16" LD73.K | length 4491.1
  Top Layer w10: v1(3482,1776) 3482,1822.41 3465,1839.41 3465,1875 3546,1956 3600,1956 3621,1977 3621,2166 3557,2230 3557,2866 3612,2921 3688.81,2921 3689.54,2921.73 3757.77,2921.73 3812,2867.5
  Bottom Layer w10: v1(3482,1776) 3482,1852 3492,1862 3736,1862 3787,1811 3873.23,1811 3911.23,1773 5886,1773 5892,1767 5892,1680 5882,1670 5598.06,1670 LD73.K@5558.33,1709.73
NetLED74_K: "U8 [500Hz].15" LD74.K | length 3179.9
  Top Layer w10: v1(3810,1751) 3810,1816.77 3849,1855.77 3849,2560 3675,2734 3675,2890 3688,2903 3696.27,2903 3696.99,2903.73 3740,2903.73 3775,2868.73 3775,2846 3790,2831 3875.5,2831 3912,2867.5
  Bottom Layer w10: v1(3810,1751) 3840,1721 4587,1721 4638,1670 5371.71,1670 LD74.K@5411.44,1709.73
NetLED75_K: "U8 [500Hz].14" LD75.K | length 3097.9
  Top Layer w10: 4012,2867.5 4039,2894.5 4039,2906.69 4054.04,2921.73 4434.46,2921.73 4435.19,2921 4479.49,2921 4526,2874.49 4526,2701 4546,2681 4546,2592.91 4679.99,2458.92 4679.99,2453.99 4813.98,2320 4863,2320 5014,2169 5246.6,2169 5372,2043.6 5372,1914 5400,1886 5689,1886 5745,1830 5745,1680 5735,1670 5304.29,1670 LD75.K@5264.56,1709.73
NetLED76_K: "U8 [500Hz].13" LD76.K | length 3555.8
  Top Layer w10: 4112,2867.5 4112,2840 4173,2779 4173,2478 4255,2396 4255,2273 4362,2166 v1(4362,1936) ; LD76.K@5117.67,1709.73 5117.13,1709.73 5060,1652.6 5060,1028 5073,1015 5142,1015 5157,1030 5157,1421 5110,1468 5110,1560 5175,1625 5175,1835 v1(5144,1866)
  Bottom Layer w10: v1(4362,1936) 4443,1936 4513,1866 v1(5144,1866)
NetLED77_K: "U8 [500Hz].12" LD77.K | length 1780.7
  Top Layer w10: 4212,2867.5 4249,2830.5 4249,2440 4296,2393 4388.91,2393 4466.23,2315.68 4466.23,2015.77 4589,1893 4589,1718 4640,1667 4928.05,1667 LD77.K@4970.78,1709.73
NetLED78_K: "U8 [500Hz].11" LD78.K | length 1493.1
  Top Layer w10: 4312,2867.5 4353,2826.5 v1(4353,2594) ; v1(4481,2607) 4542,2546 4542,2431 4535,2424 4536,2423 4536,2226 4612.04,2149.96 4626.04,2149.96 4739,2037 4739,1794.62 LD78.K@4823.89,1709.73
  Bottom Layer w10: 4312,2867.5 4312,2853 4313,2852 ; v1(4353,2594) 4359.5,2600.5 4474.5,2600.5 v1(4481,2607)
NetLED79_K: "U8 [500Hz].10" LD79.K | length 1267.5
  Top Layer w10: 4412,2867.5 4412,2622.26 4484.23,2550.03 4484.23,2099.05 4607.21,1976.06 4607.21,1779.52 LD79.K@4677,1709.73
NetR7_1: "U1 [8 kHz].6" "U1 [8 kHz].7" R7.1 | length 3930.9
  Top Layer w10: v1(1038,273) 1083.63,273 1210.04,146.6 R7.1@1210.04,112
  Bottom Layer w10: v1(1038,273) 1038,523.31 1051.37,536.68 1051.37,647.37 1134,730 1669,730 1723,676 2058.17,676 2086.2,704.04 3530.04,704.04 3610.23,784.23 4039.77,784.23 4112,712 4212,712
NetR7_2: "U1 [8 kHz].8" R7.2 R8.1 | length 4140.5
  Top Layer w10: R7.2@1131.3,112 1055.37,112 1055.37,69.63 1085,40 1633.41,40 1656.04,62.63 1656.04,438.88 1726.91,509.75 1726.91,720.91 v1(1767,761)
  Bottom Layer w10: v1(1767,761) 1873,761 1940,694 1981,694 2009.04,722.04 3188.04,722.04 3269,803 4221,803 4312,712
NetR18_1: "U2 [64Hz].6" "U2 [64Hz].7" R18.1 | length 967.4
  Top Layer w10: R18.1@258.37,2155 258.37,2181 390,2181 449,2240 449,2288 480,2319 824,2319 865,2360 865,2492.5
  Bottom Layer w10: 865,2492.5 965,2492.5
NetR18_2: "U2 [64Hz].8" R18.2 R19.1 | length 2263.1
  Top Layer w10: R18.2@179.63,2155 R19.1@179.63,2303 80,2303 37,2346 37,2920 80,2963 595,2963 609,2949 609,2710 700,2619 938.5,2619 1065,2492.5
NetR31_1: "U3 [4 kHz].6" "U3 [4 kHz].7" R31.1 | length 3000.5
  Top Layer w10: R31.1@1519.37,112 1519.37,159.55 1538,178.18 v1(1538,189)
  Bottom Layer w10: v1(1538,189) 1578.24,189 1723.24,44 3626,44 3662,80 3662,120 3702,160 3741,160 3775.77,125.23 3775.77,96.5 3790,82.27 3830.5,82.27 3848.23,100 3848.23,127.23 3876,155 4075.5,155 4112,118.5 4212,118.5
NetR31_2: "U3 [4 kHz].8" R31.2 R32.1 | length 3113.7
  Top Layer w10: R32.1@1364.7,112 1440.63,112 1453.15,99.48 1453.15,84.06 1459.01,78.2 1559.03,78.2 1582,101.18 v1(1582,112) ; v1(4080,34) 4178.73,34 4263.23,118.5 4312,118.5
  Bottom Layer w10: v1(1582,112) 1574.35,104.35 1574.35,73.52 1574,73.18 1574,60 1592,42 1592,30.86 1597.86,25 3632.46,25 3641.46,34 v1(4080,34)
NetR34_1: "U4 [125Hz].8" R34.1 R35.2 | length 3446.3
  Top Layer w10: R35.2@1599.63,545 1599.63,569 1678.37,647.74 R34.1@1678.37,673.06 1678.37,698 1729,748.63 1729,830 1803.37,904.37 1803.37,976 1734,1045.37 1734,1441 1793,1500 1793,1563 1784,1572 1784,2120 1733,2171 1733,2297.54 1802,2366.54 1802,2572 1887,2657 1887,2886 1922.73,2921.73 2252.27,2921.73 2284,2890 2284,2683 2147.33,2546.33 2147.33,2492.5
NetR35_1: "U4 [125Hz].6" "U4 [125Hz].7" R35.1 | length 6642.9
  Top Layer w10: v1(1618,213) 1618,452 1678.37,512.37 R35.1@1678.37,545 ; 1947.33,2492.5 1949,2494.17 v1(1949,2647)
  Bottom Layer w10: v1(1618,213) 1613.14,213 1592.14,234 1521,234 1324,37 80,37 37,80 37,2152 227,2342 400,2342 449,2293 449,2232 480,2201 609,2201 769,2361 1189.87,2361 1475.87,2647 v1(1949,2647) ; 1947.33,2492.5 2047.33,2492.5
NetR48_1: "U5 [2kHz].8" R48.1 R49.2 | length 3316.4
  Top Layer w10: R48.1@2045.37,801.12 R49.2@2045.37,673.06 2045.37,589.37 2000,544 2000,433 2010,423 2334,423 2391,480 2391,653 v1(2569,831)
  Bottom Layer w10: v1(2569,831) 2947,831 3160,1044 3296,1044 3575.77,1323.77 3575.77,1334.11 3583.39,1341.73 3593.73,1341.73 3648.23,1341.73 3648.23,1260 3678.23,1230 3948.5,1230 3987.5,1269 4275.5,1269 4312,1305.5
NetR49_1: "U5 [2kHz].6" "U5 [2kHz].7" R49.1 | length 3286.5
  Top Layer w10: v1(1957,732) 1966.63,722.37 R49.1@1966.63,673.06 ; 4212,1305.5 4374.5,1143 4426,1143 4449,1120 4449,992 v1(4490,951)
  Bottom Layer w10: v1(1957,732) 1965.04,740.04 3164.04,740.04 3375,951 v1(4490,951) ; 4112,1305.5 4212,1305.5
NetR51_1: "U6 [250Hz].8" R51.1 R52.2 | length 6020.9
  Top Layer w10: R51.1@2150.63,261 2150.63,224.8 2086.83,161 2011.63,161 2000.63,150 R52.2@2000.63,112 2000.63,80 2026.63,54 2268.55,54 2282.55,40 3735.65,40 3749.65,54 3961,54 3975,68 3975,1110 3989,1124 4080,1124 4149,1193 4149,1570 4075,1644 4075,2079 4057,2097 4057,2316 4075,2334 4075,2571 v1(4091,2587) ; v1(3179,2585) 3229.67,2534.33 3229.67,2492.5
  Bottom Layer w10: v1(3179,2585) 3189,2575 4079,2575 v1(4091,2587)
NetR52_1: "U6 [250Hz].6" "U6 [250Hz].7" R52.1 | length 5123.4
  Top Layer w10: v1(1858,2117) 1858,1369 1940,1287 1940,1024 1919,1003 1919,409 1952,376 1952,239 1972,219 2025,219 2046,240 2046,296 2066,316 2161,316 2174.45,302.55 2174.72,302.55 2182.33,294.93 2182.33,294.67 2183,294 2183,207 2130,154 2118.86,154 2113,148.14 2113,138.54 2107.14,132.68 2090.05,132.68 2079.37,122 R52.1@2079.37,112 ; v1(2994,2592) 3029.67,2556.33 3029.67,2492.5
  Bottom Layer w10: v1(1858,2117) 1580,2117 1393,2304 1393,2534.46 1467.54,2609 2977,2609 v1(2994,2592) ; 3029.67,2492.5 3129.67,2492.5
NetR64_1: "U7 [1kHz].8" R64.1 R65.2 | length 3781.5
  Top Layer w10: R65.2@2300.63,113 2300.63,147 2379.37,226.63 ; R64.1@2379.37,261 2379.37,226.63 ; v1(3209,1871) 3079,1741 3079,1508 2927,1356 2927,980 2913,966 2865,966 2829,930 2829,754 2752,677 2752,528 2724,500 2724,437 2710,423 2658,423 2592,489 2505,489 2505,186 2485,166 2440,166 2379.37,226.63
  Bottom Layer w10: v1(3209,1871) 3360,1871 3427,1938 3619,1938 3712,2031 3764,2031 3787,2008 4203,2008 4312,1899
NetR65_1: "U7 [1kHz].6" "U7 [1kHz].7" R65.1 | length 3976.9
  Top Layer w10: R65.1@2379.37,113 2424.92,113 2448.92,137 2527.18,137 2551.18,113 v1(2562,113) ; v1(3509,98) 3542.73,64.27 3734.46,64.27 3742.19,72 3927,72 3949,94 3949,1626.27 3967,1644.27 3967,1800 4048.23,1881.23 4048.23,1916.77 4002,1963 v1(4002,1970)
  Bottom Layer w10: v1(2562,113) 2686.4,113 2713.4,140 3456.18,140 3498.18,98 v1(3509,98) ; v1(4002,1970) 4000,1970 3962,1932 3962,1880 3999,1843 4056,1843 4112,1899 4212,1899
NetR67_1: "U8 [500Hz].8" R67.1 R68.2 | length 3086.7
  Top Layer w10: R68.2@3450.37,1170 3450.37,1201.63 3436,1216 3350.86,1216 3339.93,1205.07 3339.93,1136.07 3341,1135 3341,1082 3312,1053 3242,1053 3162,1133 3162,1332 3185,1355 3260,1355 3287,1328 3287,1294.82 R67.1@3304.37,1294.82 3304.37,1330 3427,1452.63 3427,1884 3543,2000 3543,2059 3583,2099 3583,2145.76 3513,2215.76 3513,2456 v1(3493,2476)
  Bottom Layer w10: v1(3493,2476) 3531,2438 4257.5,2438 4312,2492.5
NetR68_1: "U8 [500Hz].6" "U8 [500Hz].7" R68.1 | length 2348.2
  Top Layer w10: R68.1@3371.63,1170 3371.63,1140 3388.63,1123 3522,1123 3542,1143 3780,1143 3795.67,1158.67 3795.67,1234.67 3857,1296 3857,1359 3875,1377 3875,1765 3901,1791 3901,1816 3950,1865 3950,1919 3944,1925 3944,2048 3975,2079 3975,2364 4049,2438 4049,2600 4074,2625 4114,2625 4129,2610 4129,2509.5 4112,2492.5
  Bottom Layer w10: 4112,2492.5 4212,2492.5
NetU1_3: "U1 [8 kHz].3" "U1 [8 kHz].9" | length 644.9
  Bottom Layer w10: 3812,712 3866.23,657.77 4357.77,657.77 4412,712
NetU2_3: "U2 [64Hz].3" "U2 [64Hz].9" | length 644.9
  Bottom Layer w10: 565,2492.5 619.23,2438.27 1110.77,2438.27 1165,2492.5
NetU3_3: "U3 [4 kHz].3" "U3 [4 kHz].9" | length 747.9
  Bottom Layer w10: 3812,118.5 3990.5,297 4233.5,297 4412,118.5
NetU4_3: "U4 [125Hz].3" "U4 [125Hz].9" | length 630.2
  Bottom Layer w10: 1647.33,2492.5 1683.83,2456 2210.83,2456 2247.33,2492.5
NetU5_3: "U5 [2kHz].3" "U5 [2kHz].9" | length 630.2
  Bottom Layer w10: 3812,1305.5 3848.5,1342 4375.5,1342 4412,1305.5
NetU6_3: "U6 [250Hz].3" "U6 [250Hz].9" | length 630.2
  Bottom Layer w10: 2729.67,2492.5 2766.17,2529 3293.17,2529 3329.67,2492.5
NetU7_3: "U7 [1kHz].3" "U7 [1kHz].9" | length 674.6
  Bottom Layer w10: 3812,1899 3864,1847 3920.23,1847 3958.23,1809 4322,1809 4412,1899
NetU8_3: "U8 [500Hz].3" "U8 [500Hz].9" | length 630.2
  Bottom Layer w10: 3812,2492.5 3848.5,2529 4375.5,2529 4412,2492.5
OUT: J21.01 LD00.A LD01.A LD02.A LD03.A LD04.A LD05.A LD06.A LD07.A LD08.A LD09.A LD10.A LD11.A LD12.A LD13.A LD14.A LD15.A LD16.A LD17.A LD18.A LD19.A LD20.A LD21.A LD22.A LD23.A LD24.A LD25.A LD26.A LD27.A LD28.A LD29.A LD30.A LD31.A LD32.A LD33.A LD34.A LD35.A LD36.A LD37.A LD38.A LD39.A LD40.A LD41.A LD42.A LD43.A LD44.A LD45.A LD46.A LD47.A LD48.A LD49.A LD50.A LD51.A LD52.A LD53.A LD54.A LD55.A LD56.A LD57.A LD58.A LD59.A LD60.A LD61.A LD62.A LD63.A LD64.A LD65.A LD66.A LD67.A LD68.A LD69.A LD70.A LD71.A LD72.A LD73.A LD74.A LD75.A LD76.A LD77.A LD78.A LD79.A | length 17194.3
  Top Layer w10: LD09.A@4677,313.71 4738.16,374.87 4738.16,580.31 LD29.A@4677,641.47 4716,680.47 4716,930.22 LD49.A@4677,969.22 ; LD68.A@4823.89,1296.98 4823.89,1319 4863,1358.11 4863,1484 4823.89,1523.11 LD78.A@4823.89,1624.73 ; LD36.A@5117.67,2280.24 5161,2323.58 5161,2566.67 LD16.A@5119.67,2608 ; LD40.A@5999,969.22 6038,1008.22 6038,1257.98 LD60.A@5999,1296.98 ; LD70.A@5999,1624.73 6038,1663.73 6038,1913.49 LD50.A@5999,1952.49 6038,1991.49 6038,2241.24 LD30.A@5999,2280.24
  Bottom Layer w10: J21.01@829,1100 1829.41,1100 2150,779.41 2991.31,779.41 3201.86,989.97 4656.26,989.97 LD49.A@4677,969.22 LD48.A@4823.89,969.22 LD47.A@4970.78,969.22 LD46.A@5117.67,969.22 LD45.A@5264.56,969.22 LD44.A@5411.44,969.22 LD43.A@5558.33,969.22 LD42.A@5705.22,969.22 LD41.A@5852.11,969.22 LD40.A@5999,969.22 ; LD09.A@4677,313.71 LD08.A@4823.89,313.71 LD07.A@4970.78,313.71 LD06.A@5117.67,313.71 LD05.A@5264.56,313.71 LD04.A@5411.44,313.71 LD03.A@5558.33,313.71 LD02.A@5705.22,313.71 LD01.A@5852.11,313.71 LD00.A@5999,313.71 ; LD29.A@4677,641.47 LD28.A@4823.89,641.47 LD27.A@4970.78,641.47 LD26.A@5117.67,641.47 LD25.A@5264.56,641.47 LD24.A@5411.44,641.47 LD23.A@5558.33,641.47 LD22.A@5705.22,641.47 LD21.A@5852.11,641.47 LD20.A@5999,641.47 ; LD69.A@4677,1296.98 LD68.A@4823.89,1296.98 LD67.A@4970.78,1296.98 LD66.A@5117.67,1296.98 LD65.A@5264.56,1296.98 LD64.A@5411.44,1296.98 LD63.A@5558.33,1296.98 LD62.A@5705.22,1296.98 LD61.A@5852.11,1296.98 LD60.A@5999,1296.98 ; LD79.A@4677,1624.73 LD78.A@4823.89,1624.73 LD77.A@4970.78,1624.73 LD76.A@5117.67,1624.73 LD75.A@5264.56,1624.73 LD74.A@5411.44,1624.73 LD73.A@5558.33,1624.73 LD72.A@5705.22,1624.73 LD71.A@5852.11,1624.73 LD70.A@5999,1624.73 ; LD59.A@4677,1952.49 LD58.A@4823.89,1952.49 LD57.A@4970.78,1952.49 LD56.A@5117.67,1952.49 LD55.A@5264.56,1952.49 LD54.A@5411.44,1952.49 LD53.A@5558.33,1952.49 LD52.A@5705.22,1952.49 LD51.A@5852.11,1952.49 LD50.A@5999,1952.49 ; LD39.A@4677,2280.24 LD38.A@4823.89,2280.24 LD37.A@4970.78,2280.24 LD36.A@5117.67,2280.24 LD35.A@5264.56,2280.24 LD34.A@5411.44,2280.24 LD33.A@5558.33,2280.24 LD32.A@5705.22,2280.24 LD31.A@5852.11,2280.24 LD30.A@5999,2280.24 ; LD19.A@4679,2608 LD18.A@4825.89,2608 LD17.A@4972.78,2608 LD16.A@5119.67,2608 LD15.A@5266.56,2608 LD14.A@5413.44,2608 LD13.A@5560.33,2608 LD12.A@5707.22,2608 LD11.A@5854.11,2608 LD10.A@6001,2608
pads on no net: IC1.1 IC1.5 IC1.8 J1.None

## Silkscreen, mask and mechanical layers (free items; w line width, h text height)
Top Overlay:
  region: 3518.38,1470.59 3518.38,1462.87 3515.8,1462.87 3515.8,1460.29 3513.23,1460.29 3513.23,1457.72 3510.65,1457.72 3510.65,1455.14 3508.08,1455.14 3508.08,1452.57 3505.5,1452.57 3505.5,1449.99 3500.35,1449.99 3500.35,1447.42 3263.41,1447.42 3263.41,1537.56 3474.59,1537.56 3474.59,1550.43 3263.41,1550.43 3263.41,1638 3474.59,1638 3474.59,1650.88 3263.41,1650.88 3263.41,1738.44 3420.51,1738.44 3423.08,1738.44 3520.95,1738.44 3520.95,1470.59 hole: 3363.85,1457.72 3363.85,1529.83 3268.56,1529.83 3268.56,1493.77 3340.67,1493.77 3340.67,1488.62 3289.16,1488.62 3286.58,1488.62 3268.56,1488.62 3268.56,1452.57 3358.7,1452.57 3358.7,1455.14 3361.27,1455.14 3361.27,1457.72
  lines w10: 634,39 914,39 914,319 634,319 634,39 ; 640,943 920,943 920,1223 640,1223 640,943 ; 929,1790 1209,1790 1209,2070 929,2070 929,1790 ; 1081,2104 1361,2104 1361,2384 1081,2384 1081,2104 ; 1082,1056 1362,1056 1362,1336 1082,1336 1082,1056 ; 1232.99,1791.87 1512.99,1791.87 1512.99,2071.87 1232.99,2071.87 1232.99,1791.87 ; 1536,1791 1816,1791 1816,2071 1536,2071 1536,1791 ; 1688,2105 1968,2105 1968,2385 1688,2385 1688,2105 ; 1697,1059 1977,1059 1977,1339 1697,1339 1697,1059 ; 1839.99,1792.87 2119.99,1792.87 2119.99,2072.87 1839.99,2072.87 1839.99,1792.87 ; 2145,1798 2425,1798 2425,2078 2145,2078 2145,1798 ; 2293,2106 2573,2106 2573,2386 2293,2386 2293,2106 ; 2299,1058 2579,1058 2579,1338 2299,1338 2299,1058 ; 2448.99,1799.87 2728.99,1799.87 2728.99,2079.87 2448.99,2079.87 2448.99,1799.87 ; 2751,1796 3031,1796 3031,2076 2751,2076 2751,1796 ; 2901,2106 3181,2106 3181,2386 2901,2386 2901,2106 ; 2907,1057 3187,1057 3187,1337 2907,1337 2907,1057 ; 3054.99,1797.87 3334.99,1797.87 3334.99,2077.87 3054.99,2077.87 3054.99,1797.87
  text "Spectrum Analyzer v1" at 4664,2858.99 h60
  text "64Hz" at 6071,2708 h40 r270
  text "PXL || electronika-ICT" at 3442,2608 h40 r270
  text "125Hz" at 6071,2410 h40 r270
  text "250Hz" at 2317.13,2132.33 h50
  text "500Hz" at 2925.13,2132.33 h50
  text "64Hz" at 1134.13,2130.33 h50
  text "125Hz" at 1718.13,2130.33 h50
  text "250Hz" at 6071,2082 h40 r270
  text "IN4-1" at 2175.13,1824.33 h50
  text "IN4-2" at 2478.13,1824.33 h50
  text "IN4-1" at 2781.13,1822.33 h50
  text "IN4-2" at 3084.13,1822.33 h50
  text "IN3-1" at 1566.13,1817.33 h50
  text "IN3-2" at 1869.13,1817.33 h50
  text "IN2-1" at 959.13,1816.33 h50
  text "IN2-2" at 1262.13,1816.33 h50
  text "500Hz" at 6071,1750 h40 r270
  text "VCC" at 33,1502 h60 r270
  text "-" at 150.49,1456 h45 r90
  text "1kHz" at 6071,1399 h40 r270
  text "+" at 113,1340.5 h45
  text "Audio IN" at 35,1172 h100 r270
  text "2kHz" at 2351,1091 h50
  text "4kHz" at 1749,1089 h50
  text "8kHz" at 1134,1087 h50
  text "1kHz" at 2955,1087 h50
  text "2kHz" at 6071,1070 h40 r270
  text "OUT" at 703,965 h60
  text "4kHz" at 6071,743 h40 r270
  text "8kHz" at 6071,416 h40 r270
  text "Miguel Nunez 2023" at 4744,114.99 h60
  text "INPUT" at 664,65 h50

## Text inside footprints (layer, text, board x,y; h text height)
C5: Top Overlay "+" at 1158.08,312.31 h39.37
C8: Top Overlay "+" at 922,2237 h39.37
C9: Top Overlay "+" at 594.67,2239.32 h39.37
C14: Top Overlay "+" at 1573,884 h30
C15: Top Overlay "+" at 1565,678 h30